# Altium PCB pcb.PcbDoc
Units mm, origin at the board's own origin, x right, y up, seen from the top; angles counter-clockwise.
Board outline 211 x 52 mm, 2 copper layers (Top Layer, Bottom Layer); 56 components, 43 nets, 371 pads, 4 vias.
Unrouted connection lines stored in the file: 132.
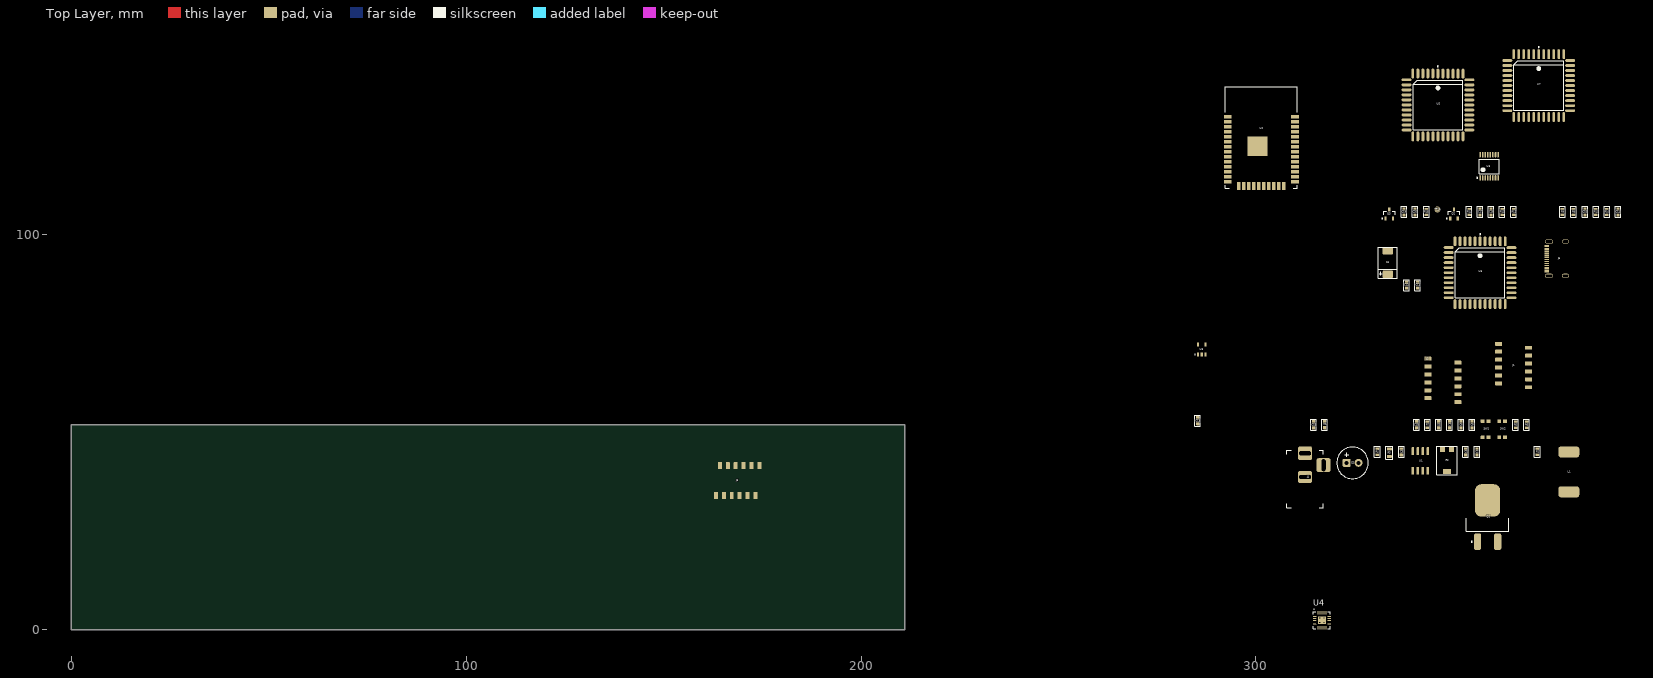
[diagram p0: Top Layer view]
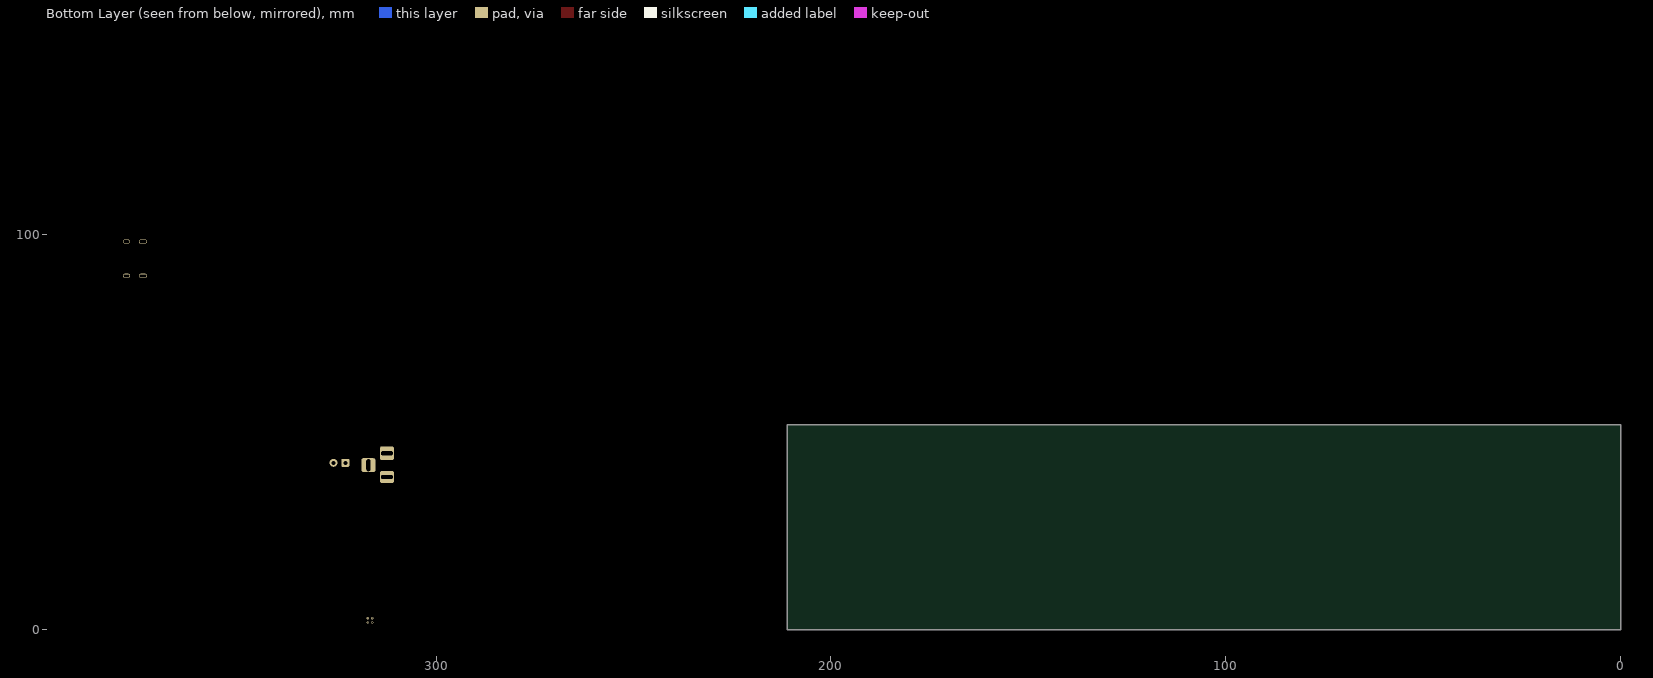
[diagram p1: Bottom Layer view, seen from below]

## Layer stack, top to bottom
Top Solder: solder mask 0.0102, Solder Resist, Dk 3.5
Top Layer: signal copper 0.0356
Dielectric 1: dielectric 0.32, FR-4, Dk 4.8
Bottom Layer: signal copper 0.0356
Bottom Solder: solder mask 0.0102, Solder Resist, Dk 3.5

## Board outline
0,0 211,0 211,52 0,52

## Design rules (kind name [scope] priority, off if disabled: settings)
BoardOutlineClearance [All] p1: gap=0.198 ignorepadtopadclearanceinfootprint=FALSE except(0: Arc-SplitContinuation Track-SplitContinuation SMDPad-SplitContinuation THPad-SplitContinuation Via-SplitContinuation Fill-SplitContinuation Poly-SplitContinuation Region-SplitContinuation Text-SplitContinuation)
Clearance [All] p1: gap=0.152 ignorepadtopadclearanceinfootprint=TRUE except(0.305: Arc-Hole Track-Hole SMDPad-Hole THPad-Hole Via-Hole Fill-Hole Poly-Hole Region-Hole Text-Hole)
ComponentClearance [All] p1: gap=0.1 collisioncheckmode=3 verticalgap=0.1 showdistances=FALSE
DiffPairsRouting DiffPairsRouting_USB [InDifferentialPair('USB')] p1: maxlimit=0.5 minlimit=0.16 mostfreqgap=0.2 toplayer_minwidth=0.16 toplayer_maxwidth=5 toplayer_prefwidth=0.265 bottomlayer_minwidth=0.16 bottomlayer_maxwidth=5 bottomlayer_prefwidth=0.265 maxuncoupledlength=12.7
DiffPairsRouting DiffPairsRouting_ETH [InDifferentialPair('ETH_RX') or InDifferentialPair('ETH_TX')] p2: maxlimit=0.5 minlimit=0.16 mostfreqgap=0.194 toplayer_minwidth=0.16 toplayer_maxwidth=5 toplayer_prefwidth=0.22 bottomlayer_minwidth=0.16 bottomlayer_maxwidth=5 bottomlayer_prefwidth=0.22 maxuncoupledlength=12.7
DiffPairsRouting [All] p3: maxlimit=0.5 minlimit=0.16 mostfreqgap=0.3 toplayer_minwidth=0.16 toplayer_maxwidth=5 toplayer_prefwidth=0.3 bottomlayer_minwidth=0.16 bottomlayer_maxwidth=5 bottomlayer_prefwidth=0.3 maxuncoupledlength=12.7
HoleSize [All] p1: absolutevalues=TRUE maxlimit=6.3 minlimit=0.025 maxpercent=80.000 minpercent=20.000
MatchedLengths MatchedLengths_1 [InNetClass('RX')] p1: tolerance=2 checknetsindiffpair=FALSE checkdiffpairvsdiffpair=TRUE checkxsignals=TRUE checkothers=TRUE
MatchedLengths [InNetClass('TX')] p2: tolerance=2 checknetsindiffpair=FALSE checkdiffpairvsdiffpair=TRUE checkxsignals=TRUE checkothers=TRUE
MinimumAnnularRing [All] p1: minimumring=0.102
MinimumSolderMaskSliver [All] p1: minsoldermaskwidth=0.1
PlaneClearance [All] p1: clearance=0.1
PlaneConnect [All] p1: planeconnectstyle=Relief reliefexpansion=0.15 reliefentries=4 reliefconductorwidth=0.152 reliefairgap=0.2
PolygonConnect [All] p1: connectstyle=Relief reliefconductorwidth=0.152 reliefentries=4 polygonreliefangle="90 Angle" airgapwidth=0.152
RoutingVias [All] p1: holewidth=0.3 width=0.6 viastyle="Through Hole" minholewidth=0.2 minwidth=0.45 maxholewidth=6.3 maxwidth=10
SilkToSilkClearance [All] p1: silktosilkclearance=0.152
SilkToSolderMaskClearance [IsPad] p1: minsilkscreentomaskgap=0.152 clearancetoexposedcopper=TRUE
SolderMaskExpansion [All] p1: expansion=0.076 istentingtop=FALSE
Width [All] p1: maxlimit=10 minlimit=0.152 preferedwidth=0.152 minimp=50.000000 maximp=50.000000 favimp=50.000000
22 further rules are at their usual default settings.

## Classes and differential pairs
component class schematic: C1 C2 C3 C5 C7 C9 C11 C12 C13 F1 J3 J4 J5 L1 Q2 R2 R4 R13 R15 SW1 SW2 TP_1 U1 U5 U8
differential pair USB: +USB_P -USB_N

## Components (designator, comment, footprint, x,y, rotation, side; value= is the part's Value field where it differs from the comment)
C1 "passive_5" "capacitor 0603" 353.06,45.085 r90 top value=100nF
C2 "passive_5" "capacitor 0603" 355.981,45.085 r90 top value=100nF
C3 "passive_5" "capacitor 0603" 336.804,45.085 r90 top value=100nF
C4 "Tantal-kondensatorer" TAJD107K020RNJ 333.375,92.991 r90 top value=100uF
C5 "cappacitor" "4.7uF 250V" 322.961,42.291 r0 top value="4.7uF 250V"
C6 "passive_5" "capacitor 0603" 346.202,51.943 r90 top value=100uF
C7 "passive_5" "capacitor 0603" 348.996,51.943 r90 top value=1uF
C8 "passive_5" "capacitor 0603" 351.917,51.943 r90 top value=1nF
C9 "passive_5" "capacitor 0603" 354.711,51.943 r90 top value=1nF
C10 "passive_5" "capacitor 0603" 340.614,51.943 r90 top value=1nF
C11 "passive_5" "capacitor 0603" 340.868,87.276 r90 top value=100uF
C12 "passive_5" "capacitor 0603" 338.074,87.276 r90 top value=100uF
C13 "passive_5" "capacitor 0603" 285.242,52.959 r90 top value=1uF
C14 "passive_5" "capacitor 0603" 391.668,105.818 r90 top value=4.7uF
C15 "passive_5" "capacitor 0603" 314.579,51.943 r90 top value=100nF
C16 "passive_5" "capacitor 0603" 383.286,105.818 r90 top value=100nF
C17 "passive_5" "capacitor 0603" 356.743,105.818 r90 top value=47pF
C18 "passive_5" "capacitor 0603" 359.537,105.818 r90 top value=47pF
C19 "passive_5" "capacitor 0603" 337.439,105.818 r90 top value=100nF
C20 "passive_5" "capacitor 0603" 340.233,105.818 r90 top value=1uF
F1 "passive_8" "ferrit bead 0603" 317.373,51.943 r90 top value="480Ω @ 100MHz"
J1 "Header 2mm" "9159 EDGE CONNECTOR" 365.252,66.929 r90 top
J2 "Header 2mm" "9159 EDGE CONNECTOR" 347.325,63.162 r90 top
J3 "Header 2mm" "9159 EDGE CONNECTOR" 168.75,37.8 r180 top
J4 "dc-jack" BarrelJack 312.42,44.704 r90 top
J5 "USB 2.0" USB4105-GF-A 376.012,94.003 r90 top
L1 "SRR1210-101M" SRR1210-101M 379.222,40.005 r0 top value=100uH
Q1 "regulator_5" IRF740STRLPBF 358.648,28.575 r90 top
Q2 "transistor_7" S8050 350.139,105.31 r90 top
Q3 "transistor_7" S8050 333.756,105.31 r90 top
R1 "passive_2" "resistor 0603" 371.221,45.085 r90 top value=5.1R
R2 "potmeter 3314G-1-502E" "potmeter 3314G-1-502E" 348.361,40.132 r90 top
R3 "passive_3" "resistor 0805" 333.756,44.831 r90 top value=0.05R
R4 "passive_2" "resistor 0603" 330.708,45.085 r90 top value=10K
R5 "passive_2" "resistor 0603" 365.76,51.943 r90 top value=27R
R6 "passive_2" "resistor 0603" 368.554,51.943 r90 top value=27R
R7 "passive_2" "resistor 0603" 343.408,51.943 r90 top value=12K
R8 "passive_2" "resistor 0603" 380.365,105.818 r90 top value=5.1R
R9 "passive_2" "resistor 0603" 377.571,105.818 r90 top value=5.1R
R10 "passive_2" "resistor 0603" 388.874,105.818 r90 top value=0R
R11 "passive_2" "resistor 0603" 386.08,105.818 r90 top value=0R
R12 "passive_2" "resistor 0603" 365.252,105.818 r90 top value=27R
R13 "passive_2" "resistor 0603" 362.331,105.818 r90 top value=27R
R14 "passive_2" "resistor 0603" 353.949,105.818 r90 top value=12K
R15 "passive_2" "resistor 0603" 343.154,105.818 r90 top value=12K
SW1 "sensor_3" "KMR621NG LFS" 358.14,50.8 r90 top
SW2 "sensor_3" "KMR621NG LFS" 362.331,50.8 r90 top
TP_1 "misc_3" "testpoint round, diameter 1.5mm" 345.948,106.453 r0 top
U1 "MAX1771" SOIC-8 341.63,42.799 r90 top
U2 "cpu_7" ESP32-WROOM-32 301.355,121.673 r0 top
U3 "MC14504BDTR2G" MC14504BDTR2G 359.029,117.375 r90 top
U4 "FTDI" FT231XQ-R 316.708,2.425 r0 top
U5 "HV5630PJ" HV5630PJ 346.075,132.92 r0 top
U6 "HV5630PJ" HV5630PJ 356.743,90.451 r0 top
U7 "HV5630PJ" HV5630PJ 371.602,137.822 r0 top
U8 "regulator_1" TCR2EF33,LM(CT 286.258,70.993 r90 top

## Footprints (in the part's own frame and the unit in brackets; to place one, negate y for a bottom-side part, rotate by r counter-clockwise, add the part's x,y. Pads: shape width x height; smd on the part's side, far side on the other; paste and mask are expansions set on the pad)
"4.7uF 250V" [mm]
  rrect25% 2x2 hole 1: 1(0,0)
  round 2 hole 1: 2(3,0)
  silkscreen extent -2.5,-4 5.5,4, body extent -2.74,-4.25 5.74,4.25, height 13.01
"9159 EDGE CONNECTOR" [mm]
  rrect25% 1x1.8 smd: 1(-5.5,-3.8) 2(-4.5,3.8) 3(-3.5,-3.8) 4(-2.5,3.8) 5(-1.5,-3.8) 6(-0.5,3.8) 7(0.5,-3.8) 8(1.5,3.8) 9(2.5,-3.8) 10(3.5,3.8) 11(4.5,-3.8) 12(5.5,3.8)
  body extent -7.5,-4.5 7.5,4.5, height 5.05
BarrelJack [mm] "https://www.digikey.no/en/products/detail/cui-devices/PJ-002A/96962"
  rrect25% 3.5x3.5 hole 1 slot 3 at 90 deg: 1(0,0)
  rrect25% 3x3.5 hole 3 slot 1 at 0 deg: 2(-6,0)
  rrect25% 3.5x3.5 hole 1 slot 3 at 0 deg: 3(-3,-4.7)
  silkscreen extent -13.8,-4.6 0.8,4.6, body extent -13.7,-4.9 0.7,4.5, height 2.99
"capacitor 0603" [mm]
  rrect25% 0.8x0.8 smd: 1(-0.75,0) 2(0.75,0)
  silkscreen extent -1.4,-0.7 1.4,0.7, body extent -0.8,-0.4 0.8,0.4, height 0.8
ESP32-WROOM-32 [mm]
  rect 2x0.9 smd: 1(-8.5,8.255) 2(-8.5,6.985) 3(-8.5,5.715) 4(-8.5,4.445) 5(-8.5,3.175) 6(-8.5,1.905) 7(-8.5,0.635) 8(-8.5,-0.635) 9(-8.5,-1.905) 10(-8.5,-3.175) 11(-8.5,-4.445) 12(-8.5,-5.715) 13(-8.5,-6.985) 14(-8.5,-8.255) 25(8.5,-8.255) 26(8.5,-6.985) 27(8.5,-5.715) 28(8.5,-4.445) 29(8.5,-3.175) 30(8.5,-1.905) 31(8.5,-0.635) 32(8.5,0.635) 33(8.5,1.905) 34(8.5,3.175) 35(8.5,4.445) 36(8.5,5.715) 37(8.5,6.985) 38(8.5,8.255)
  rect 0.9x2 smd: 15(-5.715,-9.255) 16(-4.445,-9.255) 17(-3.175,-9.255) 18(-1.905,-9.255) 19(-0.635,-9.255) 20(0.635,-9.255) 21(1.905,-9.255) 22(3.175,-9.255) 23(4.445,-9.255) 24(5.715,-9.255)
  rect 5x5 smd: 39(-1,0.755)
  silkscreen extent -9.12,-9.88 9.12,15.87, body extent -9.04,-9.79 9.04,15.75, height 3
"ferrit bead 0603" [mm]
  rrect25% 0.8x0.8 smd: 1(-0.75,0) 2(0.75,0)
  silkscreen extent -1.4,-0.7 1.4,0.7, body extent -0.79,-0.4 0.81,0.4, height 0.8
FT231XQ-R [mm] "QFN, 20-Leads, Body 4.00x4.00mm, Pitch 0.50mm, Thermal Pad 1.98x1.98mm, IPC Medium Density"
  oval 0.9x0.25 smd: 1(-1.875,1) 2(-1.875,0.5) 3(-1.875,0) 4(-1.875,-0.5) 5(-1.875,-1) 11(1.875,-1) 12(1.875,-0.5) 13(1.875,0) 14(1.875,0.5) 15(1.875,1)
  oval 0.25x0.9 smd: 6(-1,-1.875) 7(-0.5,-1.875) 8(0,-1.875) 9(0.5,-1.875) 10(1,-1.875) 16(1,1.875) 17(0.5,1.875) 18(0,1.875) 19(-0.5,1.875) 20(-1,1.875)
  rrect20% 1.98x1.98 smd: 21(0,0)
  silkscreen extent -2.15,-2.15 2.15,2.85, body extent -2,-2 2,2, height 0.8
HV5630PJ [mm] "Leaded Chip Carrier, 44-Leads, Body 17.53x17.53mm, Pitch 1.270mm, IPC Medium Density"
  oval 0.7x2.5 smd: 1(0,7.95) 2(-1.27,7.95) 3(-2.54,7.95) 4(-3.81,7.95) 5(-5.08,7.95) 6(-6.35,7.95) 18(-6.35,-7.95) 19(-5.08,-7.95) 20(-3.81,-7.95) 21(-2.54,-7.95) 22(-1.27,-7.95) 23(0,-7.95) 24(1.27,-7.95) 25(2.54,-7.95) 26(3.81,-7.95) 27(5.08,-7.95) 28(6.35,-7.95) 40(6.35,7.95) 41(5.08,7.95) 42(3.81,7.95) 43(2.54,7.95) 44(1.27,7.95)
  oval 2.5x0.7 smd: 7(-7.95,6.35) 8(-7.95,5.08) 9(-7.95,3.81) 10(-7.95,2.54) 11(-7.95,1.27) 12(-7.95,0) 13(-7.95,-1.27) 14(-7.95,-2.54) 15(-7.95,-3.81) 16(-7.95,-5.08) 17(-7.95,-6.35) 29(7.95,-6.35) 30(7.95,-5.08) 31(7.95,-3.81) 32(7.95,-2.54) 33(7.95,-1.27) 34(7.95,0) 35(7.95,1.27) 36(7.95,2.54) 37(7.95,3.81) 38(7.95,5.08) 39(7.95,6.35)
  silkscreen extent -6.3,-6.3 6.3,9.87, body extent -8.96,-8.96 8.96,8.96, height 4.37
IRF740STRLPBF [mm] "D2-PAK, 3-Pads, Body 7.93x8.70mm (max), IPC Medium Density"
  rrect50% 4.15x1.85 smd: 1(-6.25,2.54) 3(-6.25,-2.54)
  rrect50% 8.2x6.4 smd: 2(4.2,0)
  silkscreen extent -6.37,-5.35 -0.3,5.35, body extent -6.57,-5.33 8.67,5.33, height 4.83
"KMR621NG LFS" [mm]
  rrect25% 0.9x1 smd: 1(-2.05,0.725) 1(2.05,0.725) 2(-2.05,-0.725) 2(2.05,-0.725)
  body extent -2.3,-1.4 2.3,1.4, height 1.9
MC14504BDTR2G [mm] "TSOP, 16-Leads, Body 5.00x4.40mm, Pitch 0.65mm, IPC Medium Density"
  oval 1.4x0.4 smd: 1(-2.95,2.275) 2(-2.95,1.625) 3(-2.95,0.975) 4(-2.95,0.325) 5(-2.95,-0.325) 6(-2.95,-0.975) 7(-2.95,-1.625) 8(-2.95,-2.275) 9(2.95,-2.275) 10(2.95,-1.625) 11(2.95,-0.975) 12(2.95,-0.325) 13(2.95,0.325) 14(2.95,0.975) 15(2.95,1.625) 16(2.95,2.275)
  silkscreen extent -3.07,-2.55 1.85,3.17, body extent -3.2,-2.55 3.2,2.55, height 1.2
"potmeter 3314G-1-502E" [mm]
  rect 1.3x1.3 smd: 1(5.5,-1.15) 3(5.5,1.15)
  rect 1.3x2 smd: 2(0,0)
  silkscreen extent -0.8,-2.6 6.3,2.6, body extent -0.3,-2.5 5.9,2.5, height 2.71
"resistor 0603" [mm]
  rrect25% 0.6x0.9 smd: 1(-0.75,0) 2(0.75,0)
  silkscreen extent -1.4,-0.7 1.4,0.7, body extent -0.8,-0.45 0.8,0.45, height 0.5
"resistor 0805" [mm]
  rrect25% 0.7x1.25 smd: 1(-0.95,0) 2(0.95,0)
  silkscreen extent -1.66,-0.89 1.67,0.9, body extent -1,-0.62 1,0.62, height 0.5
S8050 [mm] "SOT23, 3-Leads, Body 2.90x2.40mm, Pitch 0.95mm, IPC Medium Density"
  rect 1x0.6 smd: 1(-1.15,0.95) 2(-1.15,-0.95) 3(1.15,0)
  silkscreen extent -1.27,-1.45 0.65,1.92, body extent -1.3,-1.45 1.3,1.45, height 1.1
SOIC-8 [mm]
  rrect25% 1.95x0.6 smd: 1(-2.475,1.905) 2(-2.475,0.635) 3(-2.475,-0.635) 4(-2.475,-1.905) 5(2.475,-1.905) 6(2.475,-0.635) 7(2.475,0.635) 8(2.475,1.905)
  body extent -3.08,-2.5 3.08,2.5
SRR1210-101M [mm]
  rrect50% 5.3x2.8 smd: 1(0,5.05) 2(0,-5.05)
  body extent -6,-6 6,6, height 10
TAJD107K020RNJ [mm]
  rrect25% 2x2.55 smd: 1(-3,0) 2(3,0)
  silkscreen extent -3.9,-2.4 3.9,2.4, body extent -3.75,-2.25 3.75,2.25, height 3.15
TCR2EF33,LM(CT [mm] "SOT23, 5-Leads, Body 2.90x2.80mm, Pitch 0.95mm, IPC Medium Density"
  rrect25% 1x0.6 smd: 1(-1.31,0.95) 2(-1.31,0) 3(-1.31,-0.95) 4(1.31,-0.95) 5(1.31,0.95)
  silkscreen extent -1.35,1.65 -1.25,1.75, body extent -1.41,-1.46 1.41,1.46, height 1.12
"testpoint round, diameter 1.5mm" [mm]
  round 1.5 smd: 1(0,0)
USB4105-GF-A [mm]
  rrect25% 0.6x1.15 smd: A1_B12(-3.2,2.378) A4_B9(-2.4,2.378) B1_A12(3.2,2.378) B4_A9(2.4,2.378)
  rrect25% 0.3x1.15 smd: A5(-1.25,2.378) A6(-0.25,2.378) A7(0.25,2.378) A8(1.25,2.378) B5(1.75,2.378) B6(0.75,2.378) B7(-0.75,2.378) B8(-1.75,2.378)
  oval 1x1.8 hole 0.6 slot 1.4 at 90 deg: SHELL(-4.32,-2.377) SHELL(4.32,-2.377)
  oval 1x2.1 hole 0.6 slot 1.7 at 90 deg: SHELL(-4.32,1.803) SHELL(4.32,1.803)
  round 0 hole 0.65: ""(-2.89,1.303) ""(2.89,1.303)
  body extent -4.79,-4.98 4.79,2.73, height 3.31

## Part data
C1 C2 C3 C6 C7 C8 C9 C10 C11 C12 C13 C14 C15 C16 C17 C18 C19 C20: "Capacitor 0603"
C5: "4.7uF 250Vc", ComponentLink1Description="New link", ComponentLink1URL=https://www.digikey.ca/en/products/detail/kemet/A759KS475M2EAAE496/6196534
F1: "Ferrite bead 0603"
J1 J2 J3: library part "edge connector", "Header male 1x6, pitch 2mm", ComponentLink1Description=link, ComponentLink1URL=https://www.digikey.no/en/products/detail/kyocera-avx/009159012651906/15995075
J5: library part connector_35, "USB-C (2.0)", Manufacturer 1=GCT, Manufacturer Part Number 1=USB4105-GF-A, Supplier Part Number 1=2073-USB4105-GF-ACT-ND, Link=https://www.digikey.no/product-detail/no/gct/USB4105-GF-A/2073-USB4105-GF-ACT-ND/11198510, Supplier 1=Digi-Key
Q1: "IRF740STRLPBF", ComponentLink1Description="New link", ComponentLink1URL=https://www.digikey.ca/en/products/detail/vishay-siliconix/IRF740STRLPBF/856617?s=N4IgTCBcDaIAQB0AuBJASgMQOwBYAMAygCpoAyACgEIYgC6AvkA
Q2 Q3: "S8050 NPN TRANSISTOR"
R1 R4 R5 R6 R7 R8 R9 R10 R11 R12 R13 R14 R15: "Resistor 0603"
R3: "Resistor 0805", Link=https://www.digikey.no/en/products/detail/thin-film-technology-corp/D1WEL0805CR050F-T5/16735407
SW1 SW2: "Tactile switch SMD, tiny", Manufacturer 1=C&K, Manufacturer Part Number 1="KMR621NG LFS", Supplier Part Number 1=CKN10684CT-ND, Link=https://www.digikey.no/product-detail/en/c-k/KMR621NG-LFS/CKN10684CT-ND/6035356, Supplier 1=Digi-Key
TP_1: "Test-point round, diameter 1.5mm"
U2: "ESP32-WROOM-32", ComponentLink1Description="New link", ComponentLink1URL=https://www.digikey.no/no/products/detail/espressif-systems/ESP32-WROOM-32E-H4/12696413
U3: "Level shifter, 3.3V to 12V", Link=https://www.digikey.no/en/products/detail/onsemi/MC14504BDTR2G/1478864
U4: library part ic_1, "USB to UART converter, FTDI, single, 20 pins, QFN", Manufacturer 1="FTDI, Future Technology Devices International Ltd", Manufacturer Part Number 1=FT231XQ-R, Supplier Part Number 1=768-1128-1-ND, Supplier 1=Digi-Key
U8: "LDO fixed, 3.3V output, 0.2V dropout, 200mA", Current=200mA, Manufacturer 1="Toshiba Semiconductor and Storage", Manufacturer Part Number 1=TCR2EF33,LM(CT, Output voltage=3.3V, Supplier Part Number 1=TCR2EF33LM(CTCT-ND, Dropout=0.2V, Link=https://www.digikey.no/product-detail/en/toshiba-semiconductor-and-storage/TCR2EF33-LM-CT/TCR2EF33LM-CTCT-ND/4503328, Supplier 1=Digi-Key
J4: ComponentLink1Description="New link", ComponentLink1URL=https://www.digikey.no/en/products/detail/cui-devices/PJ-002A/96962
L1: Link=https://www.digikey.ca/en/products/detail/bourns-inc/SRR1210-101M/2352898
R2: ComponentLink1Description=Value, ComponentLink1URL=5kR, ComponentLink2Description=link, ComponentLink2URL=https://www.digikey.no/no/products/detail/bourns-inc/3314G-1-502E/86462, ComponentLink3Description="New link 1"
U1: ComponentLink1Description="New link", ComponentLink1URL=https://no.mouser.com/ProductDetail/Analog-Devices-Maxim-Integrated/MAX1771CSA+?qs=1THa7WoU59HAVajYWe%2BFOg%3D%3D&utm_source=OEMSecrets&utm_medium=aggregator&utm_campaign=MAX1771CSA+&utm_term=MAX1771CSA&utm_content=Analog+Devices+Inc.

## Via types
v1: diameter 0.6, hole 0.3, Top Layer to Bottom Layer, 4 vias

## Nets (pads, with @x,y where several pads share a name; then routed paths per layer and width w, separated by ;. In a path a pad name is that pad's centre, name@x,y a point inside that pad or via, vN(x,y) a via of type N, cw(c..) or ccw(c..) an arc to the next point about the centre after c; other vN are vias at no path point)
3V3: C6.2 C7.2 C12.2 C20.2 R7.2 U2.2 U3.1 U3.13 U8.5
3V3_SHIFT_BL: U3.11
3V3_SHIFT_CLK: U3.5
3V3_SHIFT_DATA: U3.3
3V3_SHIFT_LE: U3.9
3V3_SHIFT_POL: U3.7
5V: C19.2 F1.1 J5.A4_B9 J5.B4_A9 TP_1.1 U8.1 U8.3
12V: C1.2 C4.1 C11.2 C13.2 J4.1 L1.1 U1.2 U3.16 U5.25 U6.25 U7.25
12V_SHIFT_BL: U3.12 U5.28 U6.28 U7.28
12V_SHIFT_CLK: U3.4 U5.23 U6.23 U7.23
12V_SHIFT_DATA: U3.2 U5.27
12V_SHIFT_LE: U3.10 U5.26 U6.26 U7.26
12V_SHIFT_POL: U3.6 U5.22 U6.22 U7.22
180V: C2.2 C5.1 L1.2 Q1.2 R1.2
DTR: Q3.2 R14.2 U4.18
EN: C10.2 Q2.3 R6.1 R7.1 U2.3
GND: C1.1 C2.1 C3.1 C4.2 C5.2 C6.1 C7.1 C8.2 C9.2 C10.1 C11.1 C12.1 C13.1 C14.1 C15.1 C16.1 C17.1 C18.1 C19.1 C20.1 J4.2 J4.3 J5.A1_B12 J5.B1_A12 R3.1 R4.1 R8.1 R9.1 SW1.1 SW2.1 U1.6 U1.7 U2.1 U3.8 U4.3 U4.13 U4.21 U5.24 U6.24 U7.24 U8.2
  other v1: 316.158,1.875 317.258,1.875 316.158,2.975 317.258,2.975
IO0: Q3.3 R5.1 U2.25
NetC3_2: C3.2 U1.5
NetC8_1: C8.1 R5.2 SW1.2
NetC9_1: C9.1 R6.2 SW2.2
NetC14_2: C14.2 C15.2 F1.2 U4.12
NetC16_2: C16.2 U4.10 U4.11 U4.20
NetJ5_A5: J5.A5 R9.2
NetJ5_B5: J5.B5 R8.2
NetQ1_1: Q1.1 U1.1
NetQ1_3: Q1.3 R3.2 U1.8
NetQ2_1: Q2.1 R14.1
NetQ3_1: Q3.1 R15.1
NetR1_1: R1.1 R2.3 U1.3
NetR2_1: R2.1 R2.2 R4.2
NetR10_2: R10.2 U4.17
NetR11_2: R11.2 U4.1
NetR12_2: R12.2 U4.8
NetR13_2: R13.2 U4.9
NetU5_18: U5.18 U6.27
NetU6_18: U6.18 U7.27
RTS: Q2.2 R15.2 U4.19
RXD: R10.1 U2.34
shutdown: U1.4 U2.29
TXD: R11.1 U2.35
USB_N: C17.2 J5.A7 J5.B7 R13.1
USB_P: C18.2 J5.A6 J5.B6 R12.1
pads on no net: J1.1 J1.2 J1.3 J1.4 J1.5 J1.6 J1.7 J1.8 J1.9 J1.10 J1.11 J1.12 J2.1 J2.2 J2.3 J2.4 J2.5 J2.6 J2.7 J2.8 J2.9 J2.10 J2.11 J2.12 J3.1 J3.2 J3.3 J3.4 J3.5 J3.6 J3.7 J3.8 J3.9 J3.10 J3.11 J3.12 J5. J5.A8 J5.B8 J5.SHELL U2.4 U2.5 U2.6 U2.7 U2.8 U2.9 U2.10 U2.11 U2.12 U2.13 U2.14 U2.15 U2.16 U2.17 U2.18 U2.19 U2.20 U2.21 U2.22 U2.23 U2.24 U2.26 U2.27 U2.28 U2.30 U2.31 U2.32 U2.33 U2.36 U2.37 U2.38 U2.39 U3.14 U3.15 U4.2 U4.4 U4.5 U4.6 U4.7 U4.14 U4.15 U4.16 U5.1 U5.2 U5.3 U5.4 U5.5 U5.6 U5.7 U5.8 U5.9 U5.10 U5.11 U5.12 U5.13 U5.14 U5.15 U5.16 U5.17 U5.19 U5.20 U5.21 U5.29 U5.30 U5.31 U5.32 U5.33 U5.34 U5.35 U5.36 U5.37 U5.38 U5.39 U5.40 U5.41 U5.42 U5.43 U5.44 U6.1 U6.2 U6.3 U6.4 U6.5 U6.6 U6.7 U6.8 U6.9 U6.10 U6.11 U6.12 U6.13 U6.14 U6.15 U6.16 U6.17 U6.19 U6.20 U6.21 U6.29 U6.30 U6.31 U6.32 U6.33 U6.34 U6.35 U6.36 U6.37 U6.38 U6.39 U6.40 U6.41 U6.42 U6.43 U6.44 U7.1 U7.2 U7.3 U7.4 U7.5 U7.6 U7.7 U7.8 U7.9 U7.10 U7.11 U7.12 U7.13 U7.14 U7.15 U7.16 U7.17 U7.18 U7.19 U7.20 U7.21 U7.29 U7.30 U7.31 U7.32 U7.33 U7.34 U7.35 U7.36 U7.37 U7.38 U7.39 U7.40 U7.41 U7.42 U7.43 U7.44 U8.4

## Silkscreen, mask and mechanical layers (free items; w line width, h text height)
Mechanical 15:
  lines w0.01: 17.15,38.6 31.65,38.6 ; 31.65,52 31.65,38.6 ; 54.35,52 54.35,38.6 ; 84.85,52 84.85,38.6 ; 107.55,52 107.55,38.6 ; 138.05,52 138.05,38.6 ; 160.75,52 160.75,38.6 ; 31.65,38.6 47.65,38.6 47.65,37 31.65,37 31.65,38.6 ; 54.35,38.6 70.35,38.6 ; 54.35,38.6 54.35,37 70.35,37 70.35,38.6 ; 70.35,38.6 84.85,38.6 ; 84.85,38.6 84.85,37 100.85,37 100.85,38.6 84.85,38.6 ; 107.55,38.6 107.55,37 123.55,37 123.55,38.6 ; 107.55,38.6 123.55,38.6 ; 123.55,38.6 138.05,38.6 ; 138.05,38.6 138.05,37 154.05,37 154.05,38.6 138.05,38.6 ; 160.75,38.6 160.75,37 176.75,37 176.75,38.6 160.75,38.6 ; 0,0 0,52 211,52 211,0 0,0

## Text inside footprints (layer, text, board x,y; h text height)
U2: Mechanical 7 "5 mm" at 289.809,135.907 h0.5; Mechanical 7 "KEEP-OUT ZONE" at 299.465,140.389 h1; Mechanical 7 "5 mm" at 309.296,140.402 h0.5 r90; Mechanical 7 "Antenna" at 300.411,134.389 h1; Mechanical 7 "5 mm" at 312.809,135.907 h0.5